# Altium PCB SNC8600A - core_board.PcbDoc
Units mil, origin at the board's own origin, x right, y up, seen from the top; angles counter-clockwise.
Board outline 1377.95 x 1461.8 mil, 4 copper layers (Top, GND, PWR, Bottom), stack 30.4 mil thick; 43 components, 64 nets, 216 pads, 126 vias.
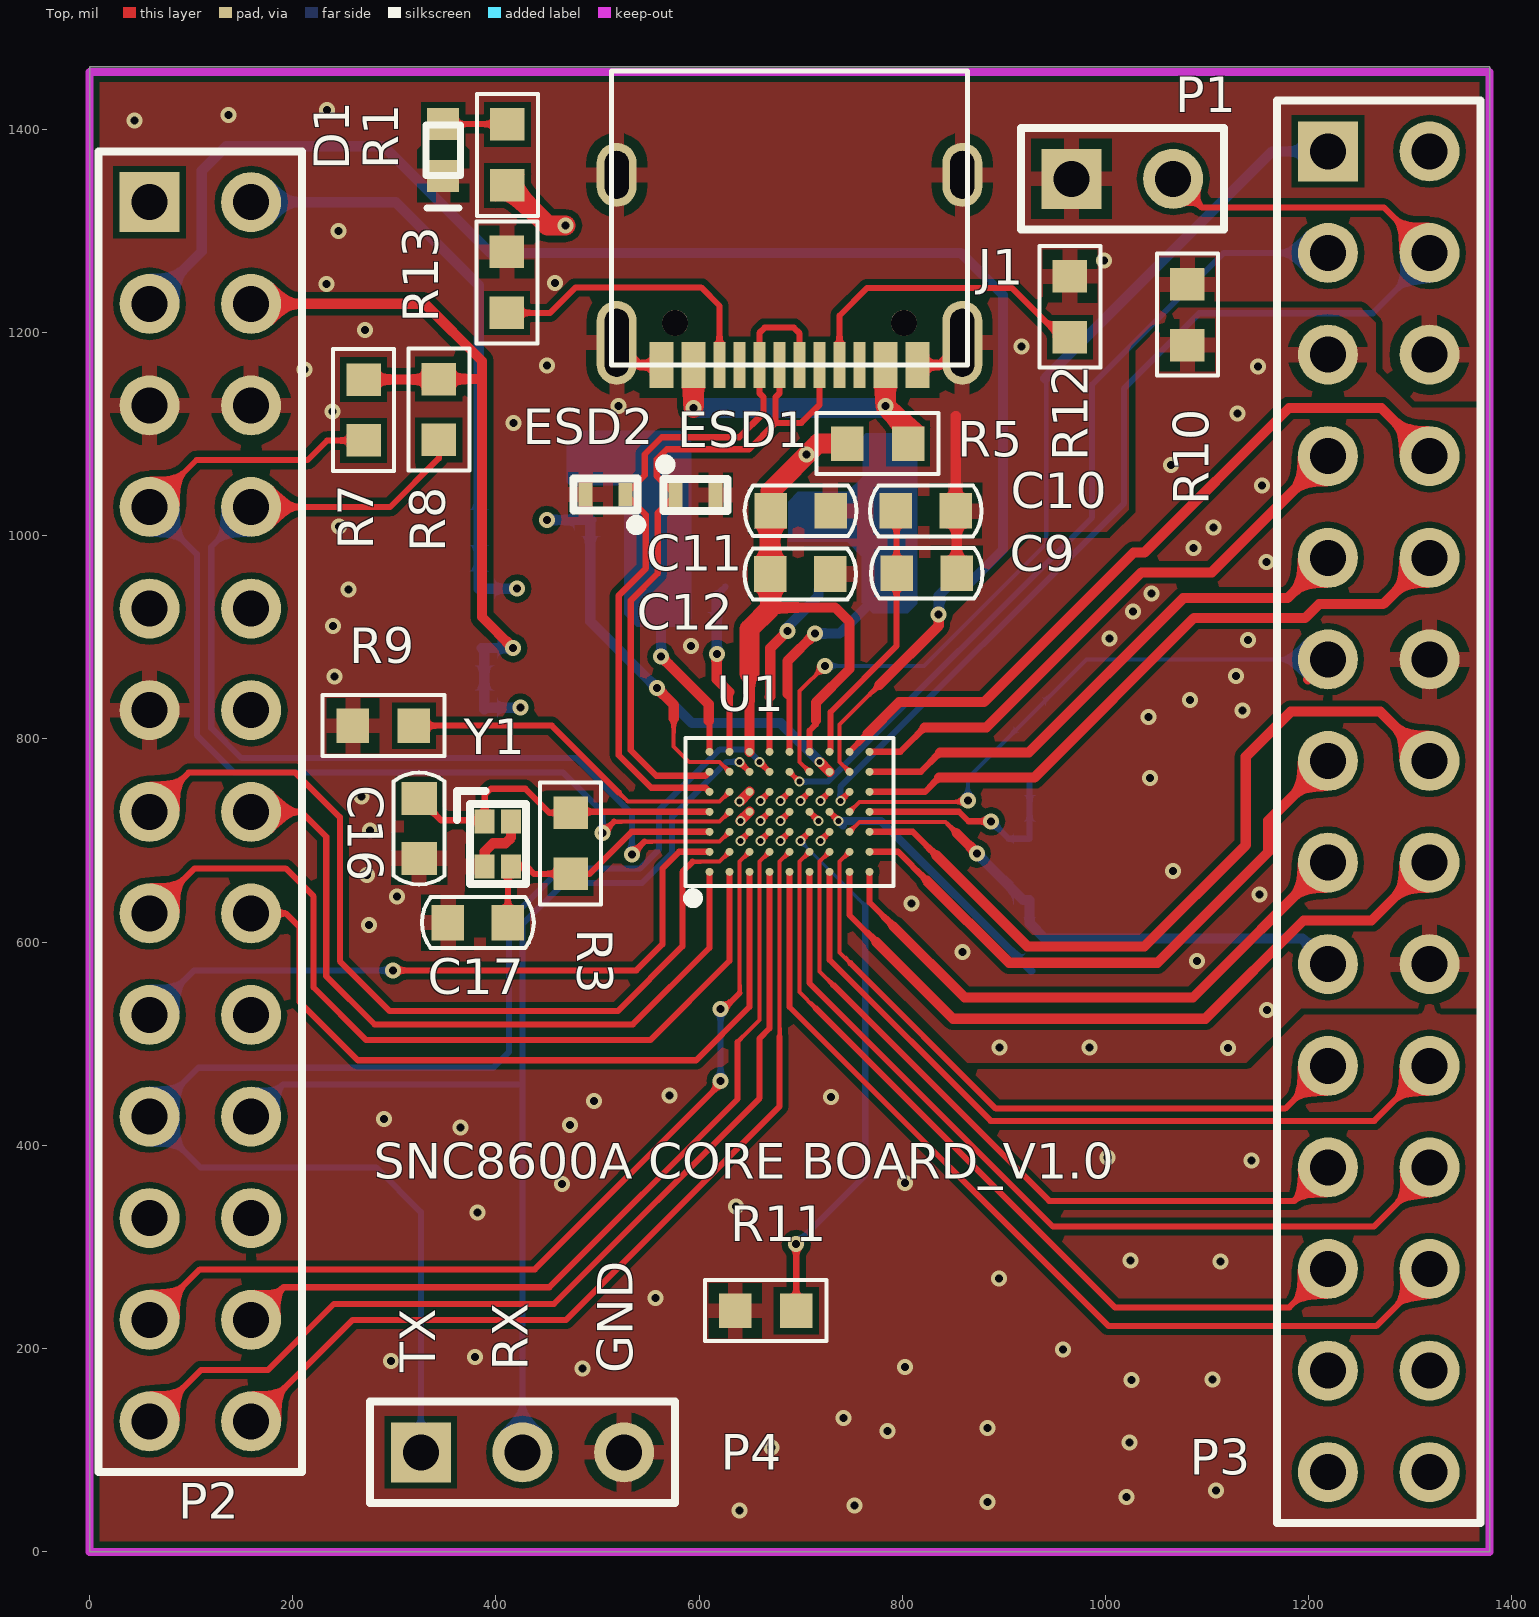
[diagram p0: Top view]
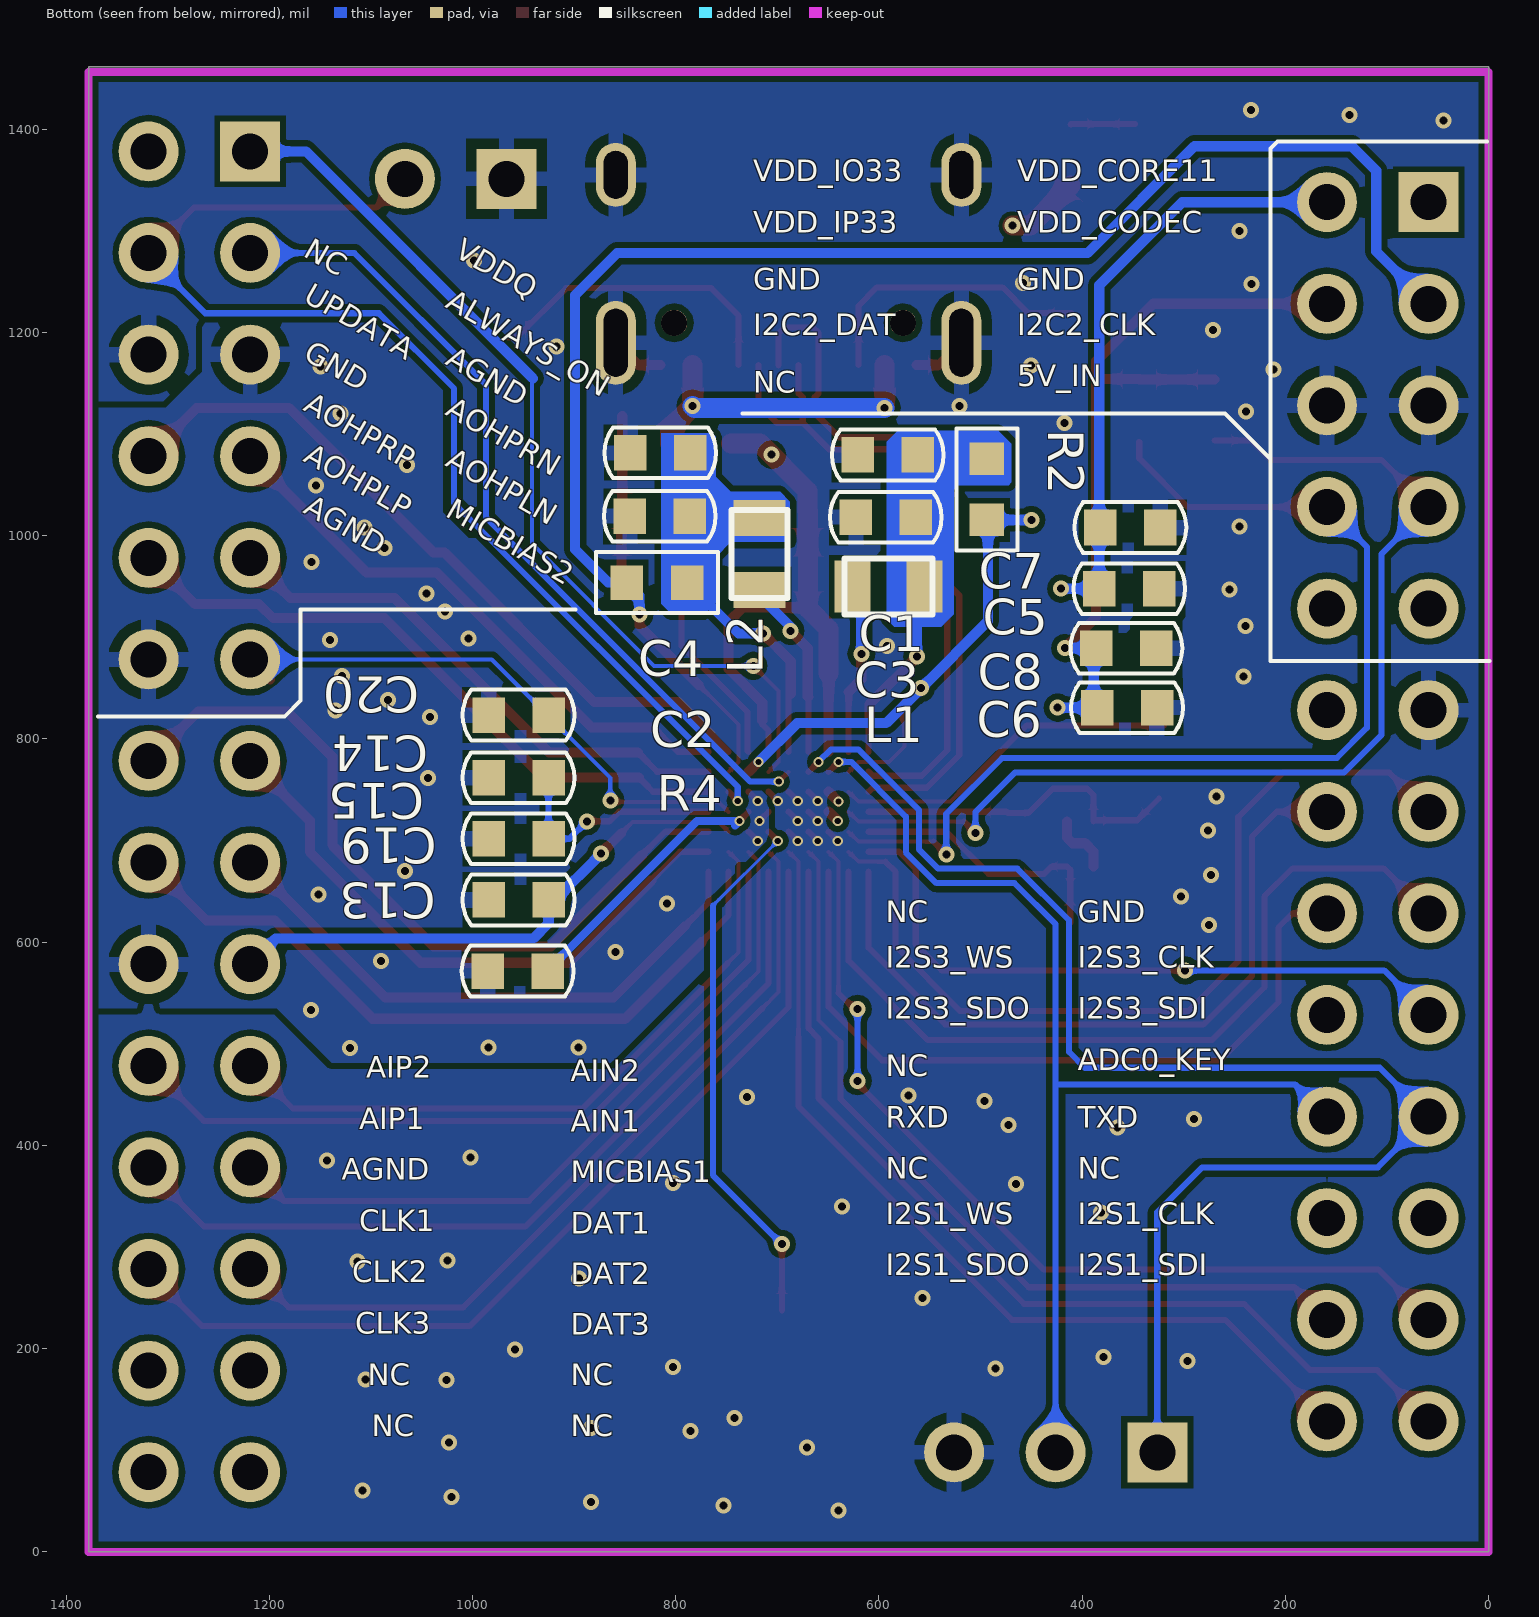
[diagram p1: Bottom view, seen from below]
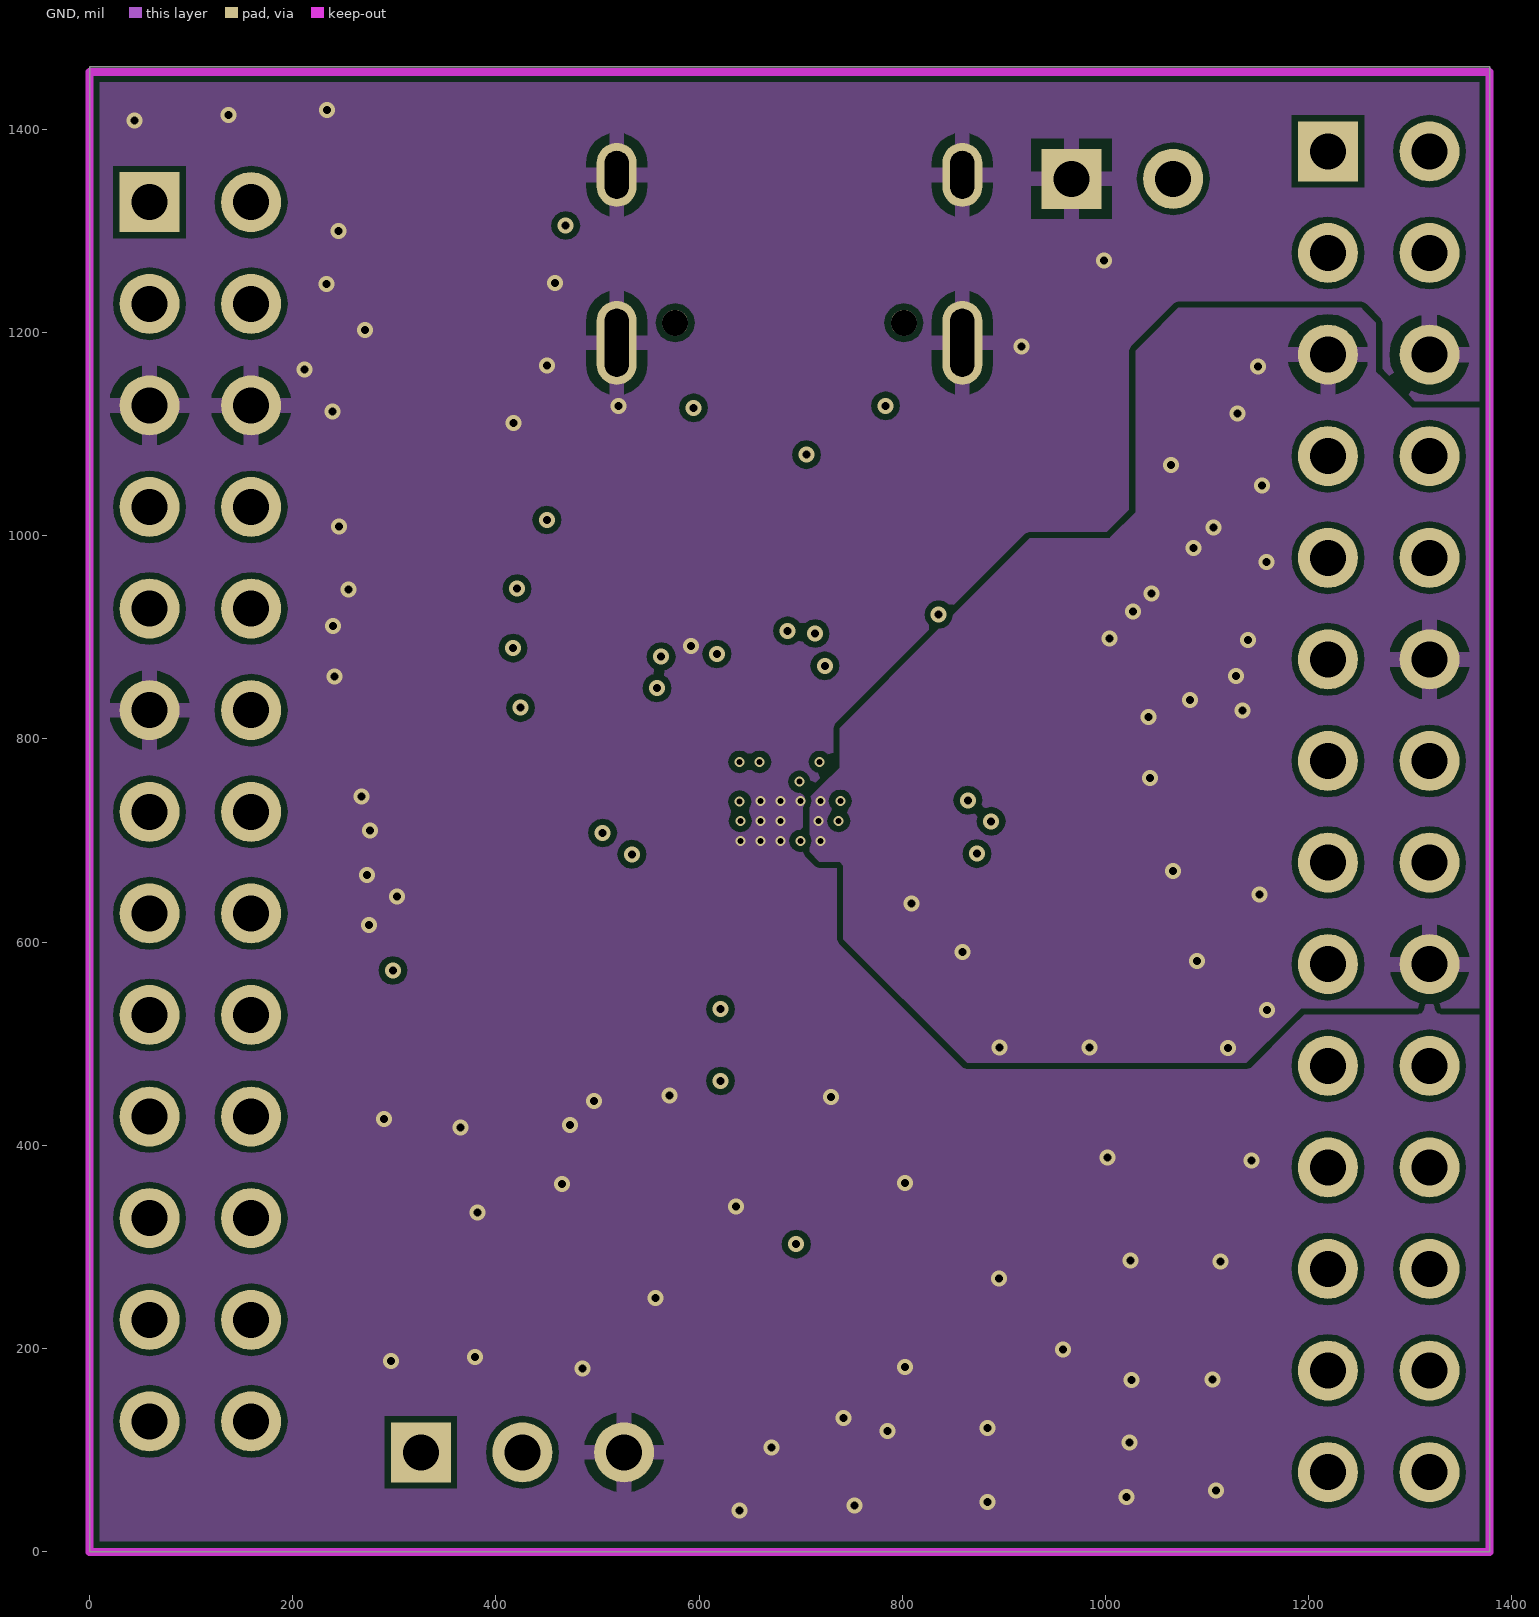
[diagram p2: GND]
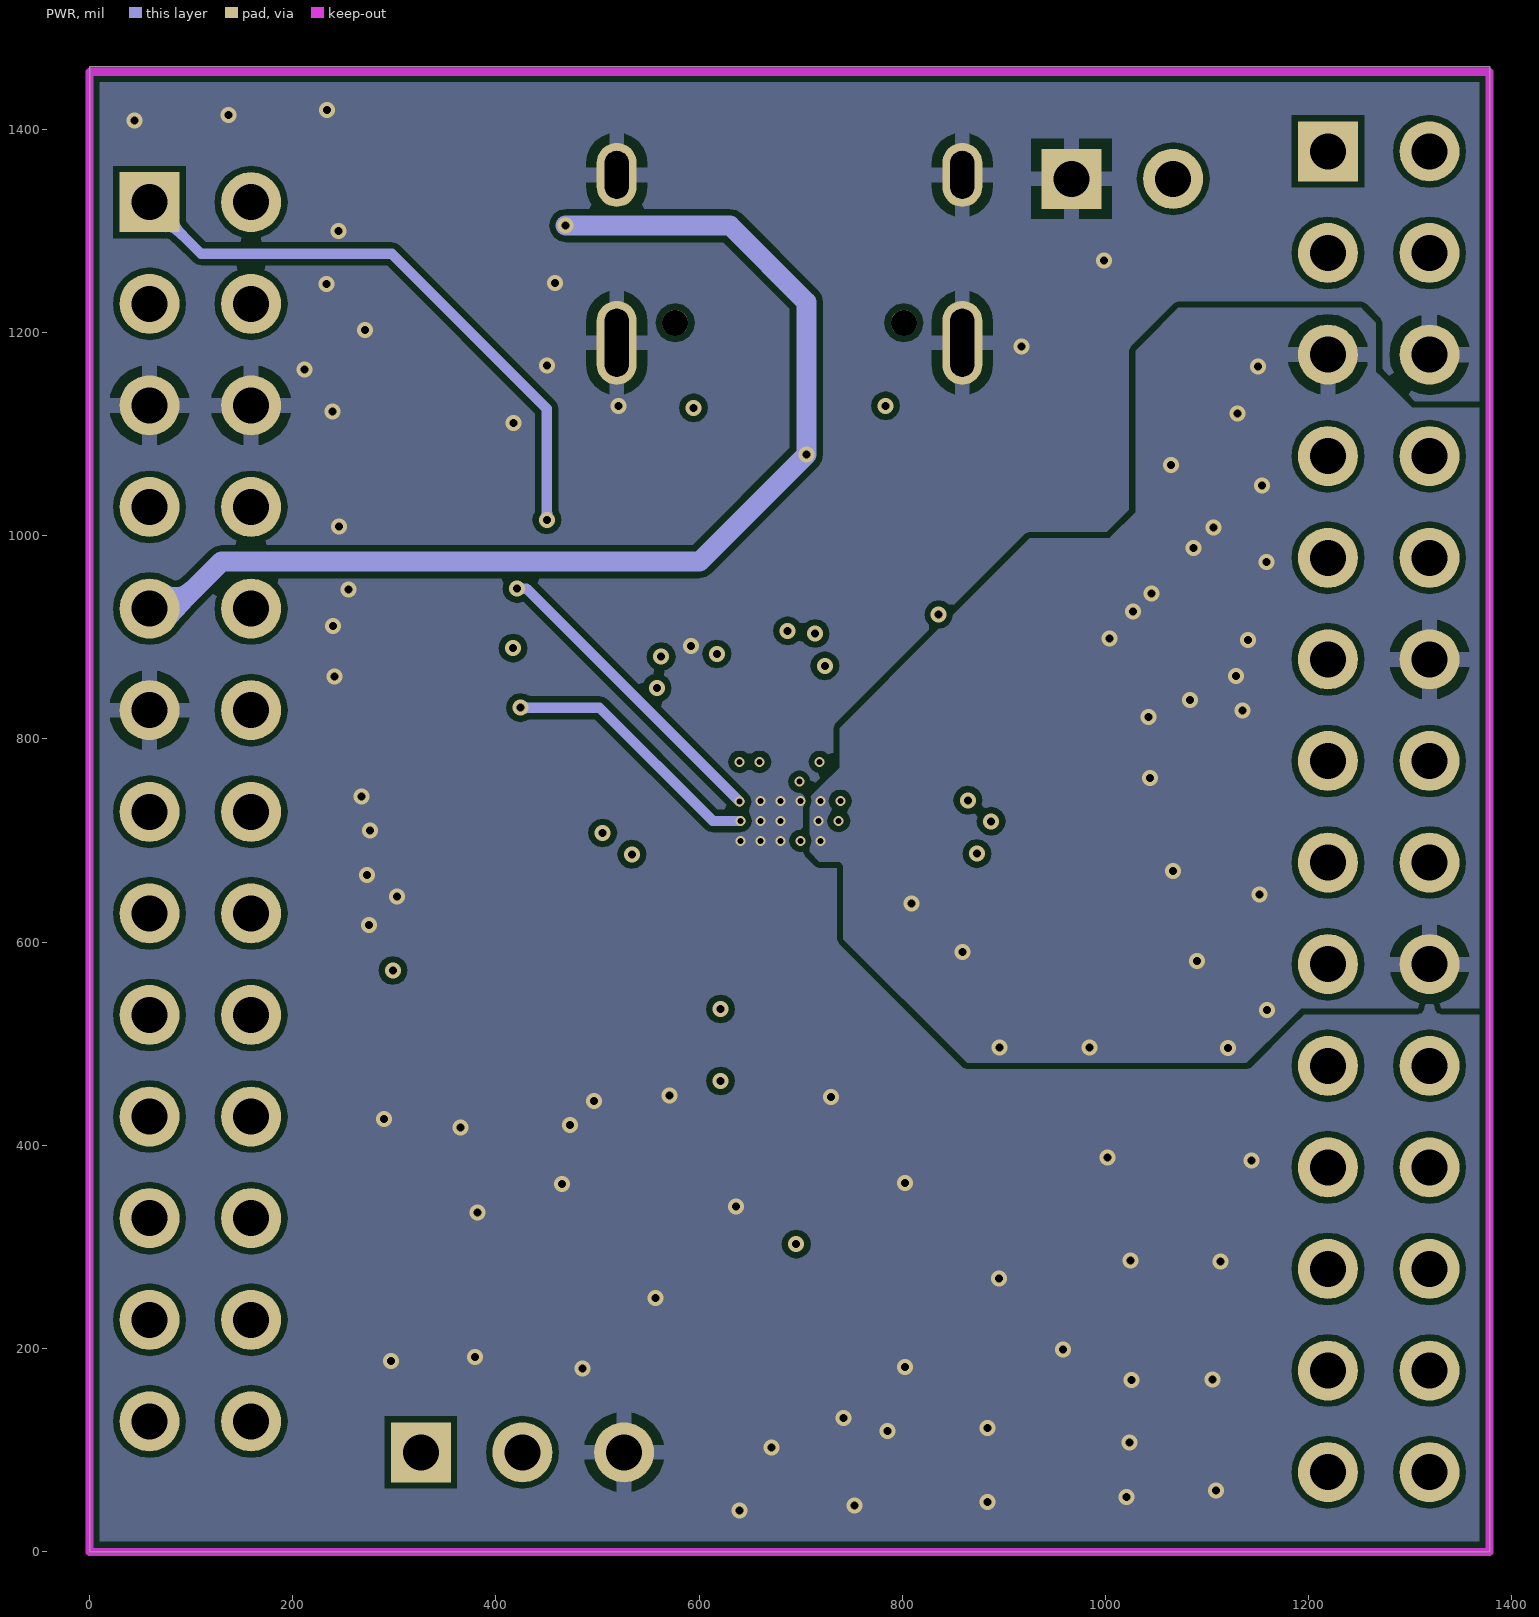
[diagram p3: PWR]

## Layer stack, top to bottom
Solder Mask Top: solder mask 0.4, Solder Resist, Dk 3.5
Top: signal copper 1.35
Dielectric 1: core 10, FR-4, Dk 4.2
GND: signal copper 1.35
Dielectric2: prepreg 5, FR-4, Dk 4.2
PWR: signal copper 1.35
Dielectric5: core 10, FR-4, Dk 4.2
Bottom: signal copper 1.35
Solder Mask Bottom: solder mask 0.4, Solder Resist, Dk 3.5

## Board outline
0,0 1377.95,0 1377.95,1461.8 0,1461.8

## Design rules (kind name [scope] priority, off if disabled: settings)
Clearance "Clearance - Default - DEFAULT - Net" [All] p1: gap=3.3
ComponentClearance "ComponentClearance - Default - DEFAULT" [All] p1: gap=6 collisioncheckmode=3 verticalgap=10 showdistances=FALSE
DiffPairsRouting DiffPair_DiffPairsRouting [InDifferentialPair ('NewDifferentialPair1')] p1: maxlimit=5.6 minlimit=5.6 mostfreqgap=5.6 toplayer_minwidth=6.2 toplayer_maxwidth=6.2 toplayer_prefwidth=6.2 midlayer1_minwidth=6.2 midlayer1_maxwidth=6.2 midlayer1_prefwidth=6.2 midlayer4_minwidth=6.2 midlayer4_maxwidth=6.2 midlayer4_prefwidth=6.2 bottomlayer_minwidth=6.2 bottomlayer_maxwidth=6.2 bottomlayer_prefwidth=6.2 maxuncoupledlength=500
DiffPairsRouting [All] p2: maxlimit=10 minlimit=10 mostfreqgap=10 toplayer_minwidth=15 toplayer_maxwidth=15 toplayer_prefwidth=15 midlayer1_minwidth=15 midlayer1_maxwidth=15 midlayer1_prefwidth=15 midlayer4_minwidth=15 midlayer4_maxwidth=15 midlayer4_prefwidth=15 bottomlayer_minwidth=15 bottomlayer_maxwidth=15 bottomlayer_prefwidth=15 maxuncoupledlength=500
HoleSize [All] p1: absolutevalues=TRUE maxlimit=500 minlimit=1 maxpercent=80.000 minpercent=20.000
HoleToHoleClearance "HoleToHoleClearance - Default - DEFAULT" [All] p1: gap=6 allowstackedmicrovias=TRUE
Length "Default Length" [All] p1: maxlimit=50000 minlimit=0
MatchedLengths DiffPair_MatchedLengths [InDifferentialPair ('NewDifferentialPair1')] p1: tolerance=1000 checknetsindiffpair=TRUE checkdiffpairvsdiffpair=TRUE checkothers=TRUE
MaxMinImpedance "Default Impedance" [All] p1: minimum=50.00 maximum=150.0
ParallelSegment "Default Parallel Segment Same Layer" [All] p1: limit=1000 gap=200
ParallelSegment "Default Parallel Segment Adjasent" [All] p2: limit=1000 gap=200
PlaneConnect "Default PlaneConnect" [All] p1: planeconnectstyle=Relief reliefexpansion=20 reliefentries=4 reliefconductorwidth=15 reliefairgap=10
PolygonConnect "PolygonConnect - Default SMT" [IsVIA] p1: connectstyle=Direct reliefconductorwidth=10 reliefentries=4 polygonreliefangle="90 Angle" airgapwidth=10
PolygonConnect "PolygonConnect - Default Pad" [All] p2: connectstyle=Relief reliefconductorwidth=15 reliefentries=4 polygonreliefangle="90 Angle" airgapwidth=10
RoutingLayers "RoutingLayers - Default - DEFAULT" [All] p1: top layer_v5=TRUE mid layer 1_v5=TRUE mid layer 4_v5=TRUE bottom layer_v5=TRUE
RoutingPriority "RoutingPriority - Default - DEFAULT" [All] p1: routingpriority=3
RoutingTopology "Default Routing Topology" [All] p1: topology=Shortest
RoutingVias "RoutingVias - Default - DEFAULT" [All] p1: holewidth=4 width=20 viastyle="Through Hole" minholewidth=4 minwidth=4 maxholewidth=100 maxwidth=100
SMDToCorner "SMDToCorner - Default - DEFAULT" [All] p1: distance=20000
SilkToBoardRegionClearance [All] p1 off:
SilkToSilkClearance [All] p1 off: silktosilkclearance=4
SilkToSolderMaskClearance [IsPad] p1: minsilkscreentomaskgap=4 clearancetoexposedcopper=TRUE
SolderMaskExpansion "SolderMaskExpansion from CAM settings" [All] p1: expansion=2
UnpouredPolygon [All] p1: allowunpoured=FALSE
Width "Default Width" [All] p1: maxlimit=39.37 minlimit=3 preferedwidth=6 minimp=50.000000 maximp=50.000000 favimp=50.000000
18 further rules are at their usual default settings.

## Classes and differential pairs
differential pair NewDifferentialPair1: +USB_DM -USB_DP

## Components (designator, comment, footprint, x,y, rotation, side; value= is the part's Value field where it differs from the comment)
C1 "4.7uF/10V" C0603 591.33,1079.6 r180 bottom
C2 "4.7uF/10V" C0603 815.8,1019.3 r180 bottom
C3 "100nF/10V" C0603 593.4,1018.2 r180 bottom
C4 "100nF/10V" C0603 815.2,1081.7 r180 bottom
C5 "100nF/10V" C0603 353.65,947.93 r0 bottom
C6 "100nF/10V" C0603 355.87,830.8 r0 bottom
C7 "1uF/10V" C0603 352.55,1008.13 r0 bottom
C8 "1uF/10V" C0603 356.5,889.4 r0 bottom
C9 "1uF/10V" C0603 824,963.2 r180 top
C10 "100nF/10V" C0603 823.1,1024.5 r180 top
C11 "100nF/10V" C0603 699.9,1024.6 r180 top
C12 "10uF/10V" C0603 699.5,962.4 r180 top
C13 "4.7uF/10V" C0603 955.7,571.6 r180 bottom
C14 "100nF/10V" C0603 954.8,761.8 r180 bottom
C15 "10uF/10V" C0603 954.8,701.8 r180 bottom
C16 "8pF/10V" C0603 324.4,711.9 r90 top
C17 "8pF/10V" C0603 382.27,619.3 r0 top
C19 "100nF/10V" C0603 954.8,641.6 r180 bottom
C20 "100nF/10V" C0603 954.8,823.5 r180 bottom
D1 "LED/BLUE/0603" LED0603 348.1,1379.6 r90 top
ESD1 "UAD8C05L01" "0402 DFN" 596.69,1040.1 r0 top
ESD2 "UAD8C05L01" "0402 DFN" 508,1040.7 r180 top
J1 "TYPEC" USB-TYPEC 688.98,1168 r180 top
L1 "LQM21PN3R3NG0" L0805 590.55,949.97 r180 bottom
L2 "LQM21PN3R3NG0" L0805 717.65,981.91 r90 bottom
P1 "Header 2" HDR1X2 966.6,1351.4 r0 top
P2 "Header 13X2" HDR2X13 59.06,1328.35 r270 top locked
P3 "Header 14X2" HDR2X14 1218.9,1378.35 r270 top locked
P4 "1X3PIN-2.54MM-STRAIGHT" HDR1X3 326.1,97.9 r0 top
R1 "4.7K/5%" R0603 411.3,1374.9 r270 top
R2 "0R/5%" R0603 493.8,1045.6 r90 bottom
R3 "1M/5%" R0603 473.5,697.3 r90 top
R4 "0R/5%" R0603 818.5,954 r180 bottom
R5 "0R" R0603 775.7,1090.8 r0 top
R7 "5.1K/ 5%" R0603 269.7,1123.8 r270 top
R8 "5.1K/ 5%" R0603 343.8,1124.3 r270 top
R9 "200R/1%" R0603 289.3,813.1 r0 top
R10 "0R/5%" R0603 1080.6,1217.7 r90 top
R11 "0R" R0603 665.6,237.3 r180 top
R12 "5.1K/5%" R0603 965,1225.4 r90 top
R13 "5.1K/5%" R0603 410.8,1249.4 r90 top
U1 "SNC8600A" BGA63C50P9X7_500X350X100 688.98,728.35 r0 top
Y1 "SF1612" SF1612 402,696.6 r270 top

## Footprints (in the part's own frame and the unit in brackets; to place one, negate y for a bottom-side part, rotate by r counter-clockwise, add the part's x,y. Pads: shape width x height; smd on the part's side, far side on the other; paste and mask are expansions set on the pad)
"0402 DFN" [mm]
  rect 0.35x0.6 smd: 1(-0.5,0) 2(0.5,0)
  silkscreen extent -0.89,-0.4 0.8,0.89
BGA63C50P9X7_500X350X100 [mm] "BGA, 63-Leads, Body 5.00x3.50mmx1.00mm, Pitch 0.50mm"
  round 0.2 smd: A1(-2,-1.5) A2(-1.5,-1.5) A3(-1,-1.5) A4(-0.5,-1.5) A5(0,-1.5) A6(0.5,-1.5) A7(1,-1.5) A8(1.5,-1.5) A9(2,-1.5) B1(-2,-1) B2(-1.5,-1) B3(-1,-1) B4(-0.5,-1) B5(0,-1) B6(0.5,-1) B7(1,-1) B8(1.5,-1) B9(2,-1) C1(-2,-0.5) C2(-1.5,-0.5) C3(-1,-0.5) C4(-0.5,-0.5) C5(0,-0.5) C6(0.5,-0.5) C7(1,-0.5) C8(1.5,-0.5) C9(2,-0.5) D1(-2,0) D2(-1.5,0) D3(-1,0) D4(-0.5,0) D5(0,0) D6(0.5,0) D7(1,0) D8(1.5,0) D9(2,0) E1(-2,0.5) E2(-1.5,0.5) E3(-1,0.5) E4(-0.5,0.5) E5(0,0.5) E6(0.5,0.5) E7(1,0.5) E8(1.5,0.5) E9(2,0.5) F1(-2,1) F2(-1.5,1) F3(-1,1) F4(-0.5,1) F5(0,1) F6(0.5,1) F7(1,1) F8(1.5,1) F9(2,1) G1(-2,1.5) G2(-1.5,1.5) G3(-1,1.5) G4(-0.5,1.5) G5(0,1.5) G6(0.5,1.5) G7(1,1.5) G8(1.5,1.5) G9(2,1.5)
  silkscreen extent -2.6,-2.28 2.6,1.85, body extent -2.5,-1.75 2.5,1.75, height 1
C0603 [mil]
  rect 32x35 smd: 1(-29.53,0) 2(29.53,0)
  Top pour cut-out: -15,15 15,15 15,-15 -15,-15 -15,15
  silkscreen extent -55,-25 55,25
HDR1X2 [mm] "Connector; Header; 2 Position"
  rect 1.5x1.5 hole 0.9: 1(0,0)
  round 1.5 hole 0.9: 2(2.54,0)
  silkscreen extent -1.27,-1.27 3.81,1.27
HDR1X3 [mm] "Connector; Header; 3 Position"
  rect 1.5x1.5 hole 0.9: 1(0,0)
  round 1.5 hole 0.9: 2(2.54,0) 3(5.08,0)
  silkscreen extent -1.27,-1.27 6.35,1.27
HDR2X13 [mm] "Connector; Header; 13x2 Position"
  rect 1.5x1.5 hole 0.9: 1(0,0)
  round 1.5 hole 0.9: 2(0,2.54) 3(2.54,0) 4(2.54,2.54) 5(5.08,0) 6(5.08,2.54) 7(7.62,0) 8(7.62,2.54) 9(10.16,0) 10(10.16,2.54) 11(12.7,0) 12(12.7,2.54) 13(15.24,0) 14(15.24,2.54) 15(17.78,0) 16(17.78,2.54) 17(20.32,0) 18(20.32,2.54) 19(22.86,0) 20(22.86,2.54) 21(25.4,0) 22(25.4,2.54) 23(27.94,0) 24(27.94,2.54) 25(30.48,0) 26(30.48,2.54)
  silkscreen extent -1.27,-1.27 31.75,3.81
HDR2X14 [mm] "Connector; Header; 14x2 Position"
  rect 1.5x1.5 hole 0.9: 1(0,0)
  round 1.5 hole 0.9: 2(0,2.54) 3(2.54,0) 4(2.54,2.54) 5(5.08,0) 6(5.08,2.54) 7(7.62,0) 8(7.62,2.54) 9(10.16,0) 10(10.16,2.54) 11(12.7,0) 12(12.7,2.54) 13(15.24,0) 14(15.24,2.54) 15(17.78,0) 16(17.78,2.54) 17(20.32,0) 18(20.32,2.54) 19(22.86,0) 20(22.86,2.54) 21(25.4,0) 22(25.4,2.54) 23(27.94,0) 24(27.94,2.54) 25(30.48,0) 26(30.48,2.54) 27(33.02,0) 28(33.02,2.54)
  silkscreen extent -1.27,-1.27 34.29,3.81
L0805 [mm]
  rect 0.9x1.3 smd: 1(-0.9,0) 2(0.9,0)
  silkscreen extent -1.1,-0.7 1.1,0.7
LED0603 [mm]
  rect 0.8x0.8 smd: 1(-0.65,0) 2(0.65,0)
  silkscreen extent -1.45,-0.43 0.63,0.43
R0603 [mil]
  rect 32x34 smd: 1(-30,0) 2(30,0)
  silkscreen extent -60,-30 60,30
SF1612 [mm]
  rect 0.6x0.5 smd: 1(-0.56,-0.33) 2(0.56,-0.33) 3(0.56,0.33) 4(-0.56,0.33)
  silkscreen extent -1.32,-1.02 1,0.7
USB-TYPEC [mm]
  round 0.65 hole 0.65 unplated: 0(-2.86,-1.058) 0(2.86,-1.058)
  rect 0.6x1.15 smd: A1(-3.2,0) A4(-2.4,0) B1(3.2,0) B4(2.4,0)
  rect 0.3x1.15 smd: A5(-1.25,0) A6(-0.25,0) A7(0.25,0) A8(1.25,0) B5(1.75,0) B6(0.75,0) B7(-0.75,0) B8(-1.75,0)
  oval 1x2.1 hole 0.6 slot 1.7 at 90 deg: G1(-4.32,-0.557) G3(4.32,-0.557)
  oval 1x1.6 hole 0.6 slot 1.2 at 90 deg: G2(-4.32,-4.755) G4(4.32,-4.755)
  silkscreen extent -4.45,-7.35 4.45,0

## Part data
C1 C2 C3 C4 C5 C6 C7 C8 C9 C10 C11 C12 C13 C14 C15 C16 C17 C19 C20: library part "Cap Semi", "Capacitor (Semiconductor SIM Model)"
D1: library part LED0603
ESD1 ESD2: library part ESD
L1 L2: library part Inductor, "Inductor"
P1: "Header, 2-Pin"
P2: "Header, 13-Pin, Dual row"
P3: "Header, 14-Pin, Dual row"
P4: library part "Header 3", "Header, 3-Pin"
R1 R2 R3 R4 R5 R7 R8 R9 R10 R11 R12 R13: library part Res2, "Resistor"

## Via types
v1: diameter 15.75, hole 7.87, Top to Bottom, tented both sides, 106 vias
v2: diameter 10, hole 6, Top to Bottom, tented both sides, 20 vias

## Nets (pads, with @x,y where several pads share a name; then routed paths per layer and width w, separated by ;. In a path a pad name is that pad's centre, name@x,y a point inside that pad or via, vN(x,y) a via of type N, cw(c..) or ccw(c..) an arc to the next point about the centre after c; other vN are vias at no path point)
ADC0_KEY: P2.17 U1.B1 | length 661.5
  Top w6: v1(298.6,572.2) 538.2,572.2 563.8,597.8 563.8,672.5 580.28,688.98 U1.B1
  Bottom w6: P2.17 102.91,572.2 v1(298.6,572.2)
AGND: C13.1 C14.1 C15.1 C19.1 C20.1 P3.5 P3.12 P3.18 R10.1 U1.C7 U1.D6 U1.E7 | length 38.1
  Top w6: U1.D6 v2(717.64,719.37) ; v2(719.37,699.69) U1.C7 ; v2(719.37,739.06) U1.E7
  other v1: 895.7,496.5 984.2,496.5 1120.5,495.7 1159,533.4 1090,581.6 859.4,590.1 808.9,638.1 1151.8,646.7 1066.5,670.2 1044,761.6 1042.1,821.5 1135,828.1 1083.1,838.3 1128.5,862.1 1140.3,897.4 1004.1,899.1 1027.3,925.3 1045.5,943.2 1158.5,974.2 1086.8,988.1 1106.5,1008.4 1153.9,1049.7 1064.5,1069.9 1130.1,1120.5 1149.9,1166.8
AIN1: P3.15 U1.A9 | length 575.2
  Top w6: U1.A9 767.72,639.08 791.4,615.4
  Top w10: 791.4,615.4 861.3,545.5 1086.05,545.5 P3.15
AIN2: P3.13 U1.B9 | length 602.7
  Top w6: U1.B9 795.82,688.98 824.2,660.6 ; P3.13@1201.5,766.9 P3.13@1207.45,766.9
  Top w10: 824.2,660.6 905.1,579.7 1051.1,579.7 1160.2,688.8 1160.2,719.65 1207.45,766.9 P3.13
AIP1: P3.16 U1.A8 | length 719.4
  Top w6: U1.A8 748.03,626.57 774.6,600
  Top w10: 774.6,600 849.9,524.7 1098.2,524.7 1194.8,621.3 1261.85,621.3 P3.16
AIP2: P3.14 U1.C9 | length 764.7
  Top w6: U1.C9 810.24,708.66 833,685.9
  Top w10: 833,685.9 923,595.9 1038.4,595.9 1138,695.5 1138,782.6 1182.3,826.9 1270.34,826.9 P3.14
ALWAYS_ON: P3.3 U1.F5 | length 826.1
  Top w4: U1.F5 v2(698.7,758)
  Bottom w6: v2(698.7,758) 726.8,758 986.7,1017.9 986.7,1148.7 1116.35,1278.35 P3.3
AOHPLN: P3.9 U1.F9 | length 538.4
  Top w6: U1.F9 818.32,767.72 837.3,786.7
  Top w10: 837.3,786.7 924.6,786.7 1076.5,938.6 1179.15,938.6 P3.9
AOHPLP: P3.10 U1.E9 | length 646.6
  Top w6: U1.E9 822.43,748.03 836.4,762
  Top w10: 836.4,762 930,762 1087,919 1196.5,919 1210.2,932.7 1273.25,932.7 P3.10
AOHPRN: P3.7 U1.G9 | length 571.7
  Top w6: U1.G9 798.1,787.4 822.1,811.4
  Top w10: 822.1,811.4 882.9,811.4 1035.5,964 1104.55,964 P3.7
AOHPRP: P3.8 U1.G8 | length 730.7
  Top w6: U1.G8 765.9,805.27
  Top w10: 765.9,805.27 797.03,836.4 880.5,836.4 1027.5,983.4 1038.2,983.4 1180.6,1125.8 1271.44,1125.8 P3.8
DMC_IN1: P3.19 U1.B8 | length 664.8
  Top w4: U1.B8 738.31,679.26 738.31,589.94 749,579.25
  Top w6: 749,579.25 892.05,436.2 1176.75,436.2 P3.19
DMIC_CLK11: P3.20 U1.A7 | length 765.3
  Top w6: U1.A7 728.35,582.65 886.9,424.1 1264.65,424.1 P3.20
DMIC_CLK21: P3.22 U1.A6 | length 844.4
  Top w6: U1.A6 708.66,559.64 948.3,320 1264.1,320 P3.22@1320.67,376.57
DMIC_CLK31: P3.24 U1.A5 | length 917.4
  Top w6: U1.A5 688.98,536.22 1003,222.2 1266.3,222.2 P3.24@1320.67,276.57
DMIC_IN2: P3.21 U1.B7 | length 729.3
  Top w4: U1.B7 718.63,679.26 718.63,571.17 731.9,557.9
  Top w6: 731.9,557.9 944.5,345.3 1185.85,345.3 P3.21
DMIC_IN3: P3.23 U1.B6 | length 806.4
  Top w4: U1.B6 698.94,679.26 698.94,550.76 715.25,534.45
  Top w6: 715.25,534.45 1009.2,240.5 1181.05,240.5 P3.23
GND: C1.1 C2.1 C3.1 C4.1 C5.1 C6.1 C7.1 C8.1 C9.1 C10.1 C11.1 C12.1 C16.1 C17.1 D1.1 ESD1.2 ESD2.2 J1.A1 J1.B1 J1.G1 J1.G2 J1.G3 J1.G4 P1.1 P2.5 P2.6 P2.11 P3.6 P4.3 R9.1 R10.2 R11.2 R12.2 R13.2 U1.C3 U1.C4 U1.C5 U1.D4 U1.D5 U1.E4 U1.E5 U1.E6 Y1.2 Y1.4 | length 426
  Top w6: v2@639.89,698.94 v2(640.63,699.69) U1.C3 ; v2(660.31,699.69) U1.C4 ; v2(660.31,719.37) U1.D4 ; v2(660.31,739.06) U1.E4 ; v2(680,699.69) U1.C5 ; v2(680,719.37) U1.D5 ; v2(680,739.06) U1.E5 ; v2(699.69,739.06) U1.E6
  Top w10: Y1.2 389.01,689.31 397.1,697.4 409.5,697.4 414.99,702.89 Y1.4 ; J1.G3 540.85,1168 J1.B1 ; J1.A1 837.11,1168 J1.G1 ; 852.63,1117.73 C10.1 853.53,1023.6 C9.1
  other v1: 639.7,40.5 753,45.5 883.7,48.8 1020.9,53.8 1108.6,60.4 671.1,102.5 1023.4,107.5 785.3,119.1 883.7,121.6 742,131.6 1025.5,169.1 1105.3,169.5 485.1,180.3 802.6,181.9 296.5,187.7 379.2,191.9 958.1,199.3 557,249.7 895.2,268.8 1113.2,285.6 1024.7,286.8 381.7,334.1 636.4,339.9 465.2,362.2 802.6,363 1143.5,385.1 1002.2,388 365.2,417.6 472.7,420.1 289.9,425.9 496.3,443.8 729.9,447.4 571.1,449 275,617.1 302.7,645 273.2,666 276.1,710 267.6,743.4 241.3,861.7 591.9,891.4 239.5,911.3 255,946.9 245.4,1008.9 417.2,1110.8 239,1122.3 520.8,1127.9 211.7,1163.6 450.4,1167.7 917.4,1186.3 271.1,1202.3 233.3,1247.9 458.3,1248.7 998.6,1271 245.3,1300.1 44.4,1408.7 136.8,1414.3 233.7,1419
I2S1_CLK: P2.23 U1.B3 | length 895.7
  Top w4: 639.89,549.99 639.89,679.26 U1.B3
  Top w6: P2.23 108.71,278 438.2,278 621.1,460.9 v1(621.1,463.4) ; v1@621.1,531.2 639.89,549.99
  Bottom w6: v1(621.1,463.4) v1@621.1,528.6
  other v1: 621.1,534.2
I2S1_SDI: P2.25 U1.A4 | length 959.1
  Top w6: P2.25 109.61,178.9 175.5,178.9 240.5,243.9 457,243.9 659.6,446.5 659.6,505.4 669.29,515.09 U1.A4
I2S1_SDO: P2.26 U1.B5 | length 903.2
  Top w4: 679.26,507.36 679.26,679.26 U1.B5
  Top w6: P2.26 259.01,228.3 469.1,228.3 679.26,438.46 679.26,507.36
I2S1_WS: P2.24 U1.B4 | length 825.2
  Top w4: 637.8,501.8 659.57,523.57 659.57,679.26 U1.B4
  Top w6: P2.24 191.11,260.4 452.7,260.4 637.8,445.5 637.8,501.8
MICBIAS1: C19.2 P3.17 U1.C8 | length 546.4
  Top w4: U1.C8 757.75,718.38 842.52,718.38 853.9,707
  Top w10: 853.9,707 v1@873.65,687.25
  Bottom w10: v1(873.5,687.1) 919,641.6 C19.2 925.27,618.63 940.4,603.5 1193.74,603.5 P3.17
MICBIAS2: C20.2 P3.11 U1.D8 | length 573.7
  Top w4: U1.D8 757.75,738.07 862.87,738.07 v1(864.5,739.7)
  Top w10: P3.11@1199.25,858.7 P3.11
  Bottom w4: v1(864.5,739.7) 864.5,761.7 981.15,878.35 P3.11
NetC1_2: C1.2 C3.2 L1.2 R2.2 U1.G1 | length 185.1
  Top w6: 609.5,816.96 609.5,817.7 ; U1.G1 610.24,816.96
  Top w10: v1(562.65,881.05) 609.5,834.2 609.5,817.7
  Bottom w10: L1.2 562.65,942.44 v1(562.65,881.05)
NetC2_2: C2.2 C4.2 L2.2 R4.2 U1.G5 | length 222.9
  Top w6: U1.G5 688.98,844.5
  Top w10: 686.9,844.5 686.9,876.6 v1(714.1,903.8)
  Bottom w10: v1(714.1,903.8) 738.3,903.8 R4.2
NetC9_2: C9.2 C10.2 U1.G7 | length 266.4
  Top w6: U1.G7 729.3,788.36 729.3,826.5 794.42,891.62 794.42,1023.77 C10.2@792.52,1025.67
NetC16_2: C16.2 R3.2 U1.D1 Y1.1 | length 334.4
  Top w6: C16.2 345.83,720 387.66,720 Y1.1 389.01,745.01 395,751 429,751 452.7,727.3 R3.2 474.55,728.35 U1.D1
NetC17_2: C17.2 R3.1 U1.C1 Y1.3 | length 272
  Top w6: C17.2 411.8,671.36 Y1.3 430.15,674.55 437.4,667.3 R3.1 492.2,667.3 533.56,708.66 U1.C1
NetD1_2: D1.2 R1.1 | length 63.3
  Top w6: D1.2 411.01,1405.19 R1.1
NetJ1_A5: J1.A5 R12.1 | length 306.8
  Top w6: J1.A5 738.19,1216.79 765.1,1243.7 908,1243.7 956.3,1195.4 R12.1
NetJ1_B5: J1.B5 R13.1 | length 285.4
  Top w6: R13.1 453.4,1219.4 478.4,1244.4 602,1244.4 620.08,1226.32 J1.B5
NetL1_1: L1.1 U1.G2 | length 171.3
  Top w6: U1.G2 629.92,846.18
  Top w10: v1(617.4,883.7) 617.4,858.7 629.92,846.18
  Bottom w6: L1.1@617.4,941.39 L1.1
  Bottom w10: v1(617.4,883.7) L1.1@617.4,941.39
NetL2_1: L2.1 U1.G4 | length 179
  Top w6: U1.G4 669.29,841.4
  Top w10: 669.5,841.4 670.05,841.95 670.05,889.45 v1(687.1,906.5)
  Bottom w10: v1(687.1,906.5) 687.1,910.5 717.65,941.05 L2.1
NetP1_2: P1.2 P3.4 U1.E8 | length 1160.1
  Top w6: v2(739.06,739.06) U1.E8 ; P1.2 1095,1323 1274.24,1323 P3.4
  Bottom w6: v2(739.06,739.06) 739.06,752.86 1018.3,1032.1 1018.3,1145 1092.3,1219 1263.1,1219 P3.4@1311,1266.9
NetP2_18: P2.18
NetP2_21: P2.21
NetP2_22: P2.22
NetP3_2: P3.2
NetP3_25: P3.25
NetP3_26: P3.26
NetP3_27: P3.27
NetP3_28: P3.28
NetR9_2: R9.2 U1.E2 | length 345.6
  Top w4: 520.9,747.2 529.79,738.31 620.2,738.31 U1.E2
  Top w6: R9.2 455,813.1 520.9,747.2
NetR11_1: R11.1 U1.C6 | length 529.6
  Top w6: R11.1 v1(695.6,302.8) ; v2(699.69,699.69) U1.C6
  Bottom w3: v2(699.69,699.69) 763.5,635.87
  Bottom w6: v1(695.6,302.8) 763.5,370.7 763.5,635.87
P10/I2C2_CLK: P2.7 R7.2 U1.D2 | length 1072.8
  Top w4: 516.23,718.63 620.2,718.63 U1.D2
  Top w6: P2.7 105.31,1074.6 214.6,1074.6 233.8,1093.8 R7.2 ; P2.7@78.2,1022.9 P2.7@78.2,1029.3 ; v1(505.1,707.5) 516.23,718.63
  Bottom w6: P2.7 105.6,981.8 105.6,803.8 142.53,766.87 466.23,766.87 505.1,728 v1(505.1,707.5)
P11/I2C2_DAT: P2.8 R8.2 U1.C2 | length 1048.4
  Top w4: 546.19,698.94 620.2,698.94 U1.C2
  Top w6: P2.8 295.95,1028.35 343.8,1076.2 R8.2@343.8,1092.3 ; v1(533.8,686.55) 546.19,698.94
  Bottom w6: P2.8 119.8,989.09 119.8,811 149.5,781.3 478.8,781.3 533.8,726.3 v1(533.8,686.55)
P12/I2S3_CLK: P2.13 U1.B2 | length 875
  Top w4: 593.66,679.26 620.2,679.26 U1.B2
  Top w6: P2.13 97.58,766.87 202.63,766.87 246.4,723.1 246.4,581.3 295.5,532.2 520,532.2 583.6,595.8 583.6,669.2 593.66,679.26
P13/I2S3_WS: P2.14 U1.A1 | length 724.3
  Top w6: P2.14 208.45,728.35 233,703.8 233,566.6 280.5,519.1 534.9,519.1 610.24,594.44 U1.A1
P14/I2S3_SDI: P2.15 U1.A2 | length 831.8
  Top w6: P2.15 103.41,672.7 193,672.7 220.6,645.1 220.6,555.4 272.4,503.6 551.9,503.6 629.92,581.62 U1.A2
P15/I2S3_SDO: P2.16 U1.A3 | length 748.1
  Top w6: P2.16 192.95,628.35 206.8,614.5 206.8,541.1 264.1,483.8 597,483.8 649.61,536.41 U1.A3
POWER_IN: C11.2 C12.2 P2.9 R1.2 R5.1 U1.G3 U1.G6 | length 1772.6
  Top w6: U1.G6 708.66,808.16 714.9,814.4 714.9,818.3
  Top w10: U1.G3 649.61,864.41 ; 669.97,929.4 733.9,929.4 748,915.3 748,868.9 714.9,835.8 714.9,818.3
  Top w19.68: R1.2 450.9,1305.3 v1(468.7,1305.3) ; 649.61,864.41 649.61,908.21 669.97,928.57 669.97,929.4 C12.2 669.97,1024.2 C11.2 670.37,1044.17 717,1090.8 R5.1
  PWR w19.68: P2.9@78.2,922.9 129.8,974.5 600.3,974.5 v1(705.6,1079.8) 705.6,1230 630.3,1305.3 v1(468.7,1305.3)
UART_RXD: P2.20 P4.2 U1.F3 | length 1114.4
  Top w6: v2(639.89,777.44) U1.F3
  Bottom w6: P2.20 190.61,459.9 426.1,459.9 ; P4.2 426.1,459.9 ; v2(639.89,777.44) 627.24,777.44 573.47,723.67 573.47,688.17 543.5,658.2 466.62,658.2 426.1,617.68 426.1,459.9
UART_TXD: P2.19 P4.1 U1.F4 | length 1410
  Top w6: v2(659.57,777.44) U1.F4
  Bottom w6: P4.1 326.1,334.2 282,378.3 109.1,378.3 P2.19 107.11,476.4 397.3,476.4 413,492.1 413,621.55 463.82,672.38 541.78,672.38 560.48,691.08 560.48,729.88 620.4,789.8 647.21,789.8 v2(659.57,777.44)
USB_DM: ESD1.1 J1.A7 J1.B7 U1.F1 | length 682
  Top w6.2: U1.F1 606.29,763.77 557.81,763.77 532.8,788.79 532.8,936.35 559.4,962.95 559.4,1022.5 ESD1.1 558.24,1058.86 558.24,1075.2 568.14,1085.1 649.2,1085.1 675.19,1111.09 ; J1.A7 679.13,1140.26 675.19,1136.32 675.19,1111.09 ; J1.B7 718.5,1129 700.59,1111.09 675.19,1111.09
USB_DP: ESD2.1 J1.A6 J1.B6 U1.E1 | length 716.7
  Top w6.2: U1.E1 606.29,751.97 552.93,751.97 521,783.9 521,941.24 547.6,967.84 547.6,1020.79 ESD2.1 546.44,1059.46 546.44,1080.09 563.25,1096.9 639.4,1096.9 663.39,1120.89 663.39,1136.31 659.45,1140.26 J1.B6 659.45,1199.65 664.73,1204.93 693.07,1204.93 698.82,1199.18 J1.A6
VBUS: J1.A4 J1.B4 R5.2 | length 318.2
  Top w19.68: v1(594.49,1125.99) J1.B4 ; J1.A4 v1(783.46,1127.94) 805.7,1105.7 R5.2
  Bottom w19.68: v1(594.49,1125.99) 781.52,1125.99 v1(783.46,1127.94)
VCAP: C14.2 C15.2 U1.D9 | length 228.6
  Top w6: U1.D9 855.81,728.35 865.15,719 v1(887.5,719)
  Bottom w6: v1(887.5,719) 904.7,701.8 C15.2 C14.2
VDD_CODEC: P2.3 R4.1 U1.F8 | length 1562
  Top w4: U1.F8 738.31,777.44 738.31,814.11 777.6,853.4
  Top w10: 777.6,853.4 835.8,911.6 v1(835.8,922.4)
  Bottom w10: P2.3 110.5,1279.79 110.5,1359.3 134.6,1383.4 289.6,1383.4 394.8,1278.2 857.9,1278.2 899.1,1237 899.1,986.5 866.6,954 R4.1 835.8,941.3 v1(835.8,922.4)
VDD_CORE11: P2.1 R2.1 U1.F2 U1.F7 | length 1152.2
  Top w4: 575,820.4 575,792.7 590.26,777.44 620.2,777.44 U1.F2
  Top w10: v1(558.5,850.1) 575,833.6 575,820.4 ; v2(718.63,777.44) U1.F7
  PWR w10: P2.1 109.8,1277.6 297.5,1277.6 450.1,1125 v1(450.1,1015.6)
  Bottom w10: v1(450.1,1015.6) R2.1 ; R2.1@492.8,1013.2 492.8,915.8 v1(558.5,850.1) 593,815.6 680.46,815.6 v2(718.63,777.44)
VDD_IO33: C5.2 C7.2 P2.2 U1.E3 | length 913.9
  Top w10: v2(639.89,738.31) U1.E3
  PWR w10: v1(420.87,947.93) 430.27,947.93 v2(639.89,738.31)
  Bottom w10: P2.2 301.45,1328.35 383.18,1246.62 C5.2 v1(420.87,947.93)
VDD_IP33: C6.2 C8.2 P2.4 R7.1 R8.1 U1.D3 | length 1065.8
  Top w10: P2.4 330.05,1228.35 386.3,1172.1 386.3,920 v1(416.9,889.4) ; R7.1 343.3,1153.8 R8.1 386.1,1154.3 ; v2(640.63,719.37) U1.D3
  PWR w10: v1(424.17,830.8) 502,830.8 613.43,719.37 v2(640.63,719.37)
  Bottom w10: C6.2@388.6,828.9 C6.2@388.6,830.8 ; v1(416.9,889.4) C8.2 388.6,886.83 C6.2@388.6,830.8 ; v1(424.17,830.8) C6.2@388.6,830.8
VDDQ: P3.1 U1.F6 | length 920.3
  Top w4: U1.F6 699,777.38 699,847.3 v1(723.7,872)
  Bottom w4: v1(723.7,872) 821.5,872 941.7,992.2 941.7,1153.9 940.65,1154.95
  Bottom w10: 940.65,1154.95 1164.05,1378.35 P3.1
VREG: C13.2 U1.D7 | length 269.7
  Top w6: U1.D7 v2(737.32,719.37)
  Bottom w8: 741.69,715 v2(737.32,719.37) 779.13,719.37 C13.2@926.9,571.6
pads on no net: J1.0 J1.A8 J1.B8 P2.10 P2.12

## Polygon pours and split planes (outlines as drawn)
AGND on Top "Top-No Net" (solid, remove dead copper, pour order 12): 1377.95,1125.9 1301.9,1125.9 1271.4,1156.4 1266.2,1161.6 1266.2,1195 1266.2,1209.7 1253.8,1222.1 1251.6,1224.3 1160.8,1224.3 1071.7,1224.3 1038.4,1191 1029.6,1182.2 1029.6,1048.6 1029.6,1023.1 1005.4,998.9 1004,997.5 925.4,997.5 925.2,997.5 902.3,974.6 738.31,810.61 738.31,777.44 738.31,771.91 720.7,754.3 708.66,742.26 708.66,728.35 708.66,688.98 718.38,679.26 738.31,679.26 742.1,675.47 742.1,607.2 742.1,603 859.8,485.3 863.9,481.2 1126.6,481.2 1138.7,481.2 1180.3,522.8 1192.7,535.2 1377.95,535.2
GND on Top "Top-No Net" (solid, remove dead copper, pour order 13): 0,0 1377.95,0 1377.95,1456.69 0,1456.69
AGND on GND "Top-No Net" (solid, remove dead copper, pour order 11): 1377.95,1125.9 1301.9,1125.9 1271.4,1156.4 1266.2,1161.6 1266.2,1195 1266.2,1209.7 1253.8,1222.1 1251.6,1224.3 1160.8,1224.3 1071.7,1224.3 1038.4,1191 1029.6,1182.2 1029.6,1048.6 1029.6,1023.1 1005.4,998.9 1004,997.5 925.4,997.5 925.2,997.5 902.3,974.6 738.31,810.61 738.31,777.44 738.31,771.91 720.7,754.3 708.66,742.26 708.66,728.35 708.66,688.98 718.38,679.26 738.31,679.26 742.1,675.47 742.1,607.2 742.1,603 859.8,485.3 863.9,481.2 1126.6,481.2 1138.7,481.2 1180.3,522.8 1192.7,535.2 1377.95,535.2
GND on GND "Top-No Net" (solid, remove dead copper, pour order 15): 0,0 1377.95,0 1377.95,1456.69 2.09,1456.69 0,1454.6 0,1456.69
AGND on Bottom "Top-No Net" (solid, remove dead copper, pour order 10): 1377.95,1125.9 1301.9,1125.9 1271.4,1156.4 1266.2,1161.6 1266.2,1195 1266.2,1209.7 1253.8,1222.1 1251.6,1224.3 1160.8,1224.3 1071.7,1224.3 1038.4,1191 1029.6,1182.2 1029.6,1048.6 1029.6,1023.1 1005.4,998.9 1004,997.5 925.4,997.5 925.2,997.5 902.3,974.6 738.31,810.61 738.31,777.44 738.31,771.91 720.7,754.3 708.66,742.26 708.66,728.35 708.66,688.98 718.38,679.26 738.31,679.26 742.1,675.47 742.1,607.2 742.1,603 859.8,485.3 863.9,481.2 1126.6,481.2 1138.7,481.2 1180.3,522.8 1192.7,535.2 1377.95,535.2
GND on Bottom "Top-No Net" (solid, remove dead copper, pour order 14): 0,0 1377.95,0 1377.95,1456.69 2.09,1456.69 0,1454.6 0,1456.69
GND on PWR "Top-No Net" (solid, remove dead copper, pour order 16): 0,0 0,1456.69 1377.95,1456.69 1377.95,0
AGND on PWR "Top-No Net" (solid, remove dead copper, pour order 9): 1377.95,1125.9 1301.9,1125.9 1271.4,1156.4 1266.2,1161.6 1266.2,1195 1266.2,1209.7 1253.8,1222.1 1251.6,1224.3 1160.8,1224.3 1071.7,1224.3 1038.4,1191 1029.6,1182.2 1029.6,1048.6 1029.6,1023.1 1005.4,998.9 1004,997.5 925.4,997.5 925.2,997.5 902.3,974.6 738.31,810.61 738.31,777.44 738.31,771.91 720.7,754.3 708.66,742.26 708.66,728.35 708.66,688.98 718.38,679.26 738.31,679.26 742.1,675.47 742.1,607.2 742.1,603 859.8,485.3 863.9,481.2 1126.6,481.2 1138.7,481.2 1180.3,522.8 1192.7,535.2 1377.95,535.2

## Keep-outs
Keep-Out Layer:
  lines w7.87: 0,0 1377.95,0 1377.95,1456.69 0,1456.69 0,0

## Other copper
Bottom:
  region net NetC1_2: 469.7,1055.1 469.7,1090.6 482.4,1103.3 581.5,1103.3 592.4,1092.4 592.4,917.9 584.9,910.4 538.7,910.4 526.5,922.6 526.5,1045.3 521.9,1049.9 472.5,1049.9 469.8,1052.6
  region net NetC2_2: 687.6,993.9 746.2,993.6 760.3,979.5 760.3,934.2 770.9,923.6 805.2,923.6 814.5,932.9 814.5,1100.9 764.2,1100.9 760.9,1097.6 760.9,1058 746,1043.1 697.3,1043.1 687.6,1033.4

## Silkscreen, mask and mechanical layers (free items; w line width, h text height)
Silkscreen Top:
  text "SNC8600A CORE BOARD_V1.0" at 279.8,355.3 h60
  text "RX" at 443.2,178.1 h60 r90
  text "TX" at 352.1,176.5 h60 r90
  text "GND" at 546.4,175.8 h60 r90
Silkscreen Bottom:
  lines w3.94: -0.9,876.8 214.8,876.8 214.8,1381.1 207.7,1388.2 1.6,1388.2 ; 215.3,1075.9 259.6,1120.2 734.3,1120.2 ; 898.5,927.4 1169.5,927.4 1169.5,837.7 1184.9,822.3 1368.7,822.3
  text "VDD_CORE11" at 463.71,1342.1 h36
  text "VDD_IO33" at 723.57,1342.1 h36
  text "VDD_CODEC" at 463.71,1291.59 h36
  text "VDD_IP33" at 723.57,1291.59 h36
  text "VDDQ" at 1022.7,1269.7 h36 r30
  text "NC" at 1171.2,1269.7 h36 r30
  text "GND" at 463.74,1235.08 h36
  text "GND" at 723.6,1235.08 h36
  text "UPDATA" at 1171.2,1225.25 h36 r30
  text "ALWAYS_ON" at 1031.33,1219.6 h36 r30
  text "I2C2_CLK" at 463.74,1190.57 h36
  text "I2C2_DAT" at 723.6,1190.57 h36
  text "GND" at 1171.2,1168.79 h36 r30
  text "AGND" at 1031.33,1163.62 h36 r30
  text "5V_IN" at 463.74,1140.07 h36
  text "NC" at 723.6,1134.07 h36
  text "AOHPRP" at 1171.23,1118.34 h36 r30
  text "AOHPRN" at 1031.33,1113.63 h36 r30
  text "AOHPLP" at 1171.23,1067.88 h36 r30
  text "AOHPLN" at 1031.33,1063.65 h36 r30
  text "AGND" at 1171.23,1017.43 h36 r30
  text "MICBIAS2" at 1031.3,1013.67 h36 r30
  text "GND" at 404.44,612.66 h36
  text "NC" at 593.3,612.66 h36
  text "I2S3_CLK" at 404.44,568.15 h36
  text "I2S3_WS" at 593.3,568.15 h36
  text "I2S3_SDI" at 404.44,517.64 h36
  text "I2S3_SDO" at 593.3,517.64 h36
  text "ADC0_KEY" at 404.47,467.13 h36
  text "NC" at 593.3,461.13 h36
  text "AIP2" at 1104.6,459.59 h36
  text "AIN2" at 903.63,456.29 h36
  text "TXD" at 404.44,410.23 h36
  text "RXD" at 593.3,410.23 h36
  text "AIP1" at 1111.4,409.13 h36
  text "AIN1" at 903.63,406.31 h36
  text "NC" at 404.44,360.12 h36
  text "NC" at 593.3,360.12 h36
  text "AGND" at 1128.6,359.07 h36
  text "MICBIAS1" at 903.6,356.72 h36
  text "I2S1_CLK" at 404.44,315.61 h36
  text "I2S1_WS" at 593.3,315.61 h36
  text "CLK1" at 1111.4,308.62 h36
  text "DAT1" at 903.6,306.34 h36
  text "I2S1_SDI" at 404.44,265.1 h36
  text "I2S1_SDO" at 593.3,265.1 h36
  text "CLK2" at 1118.3,258.16 h36
  text "DAT2" at 903.6,256.36 h36
  text "CLK3" at 1115.6,207.71 h36
  text "DAT3" at 903.6,206.77 h36
  text "NC" at 903.6,156.78 h36
  text "NC" at 1103.3,157.25 h36
  text "NC" at 903.6,106.8 h36
  text "NC" at 1099.3,106.8 h36